# Altium PCB Controller.PcbDoc
Units mil, origin at the board's own origin, x right, y up, seen from the top; angles counter-clockwise.
Board outline 6010.03 x 4010.03 mil, 2 copper layers (Top Layer, Bottom Layer); 56 components, 119 nets, 386 pads, 30 vias.
Unrouted connection lines stored in the file: 6.
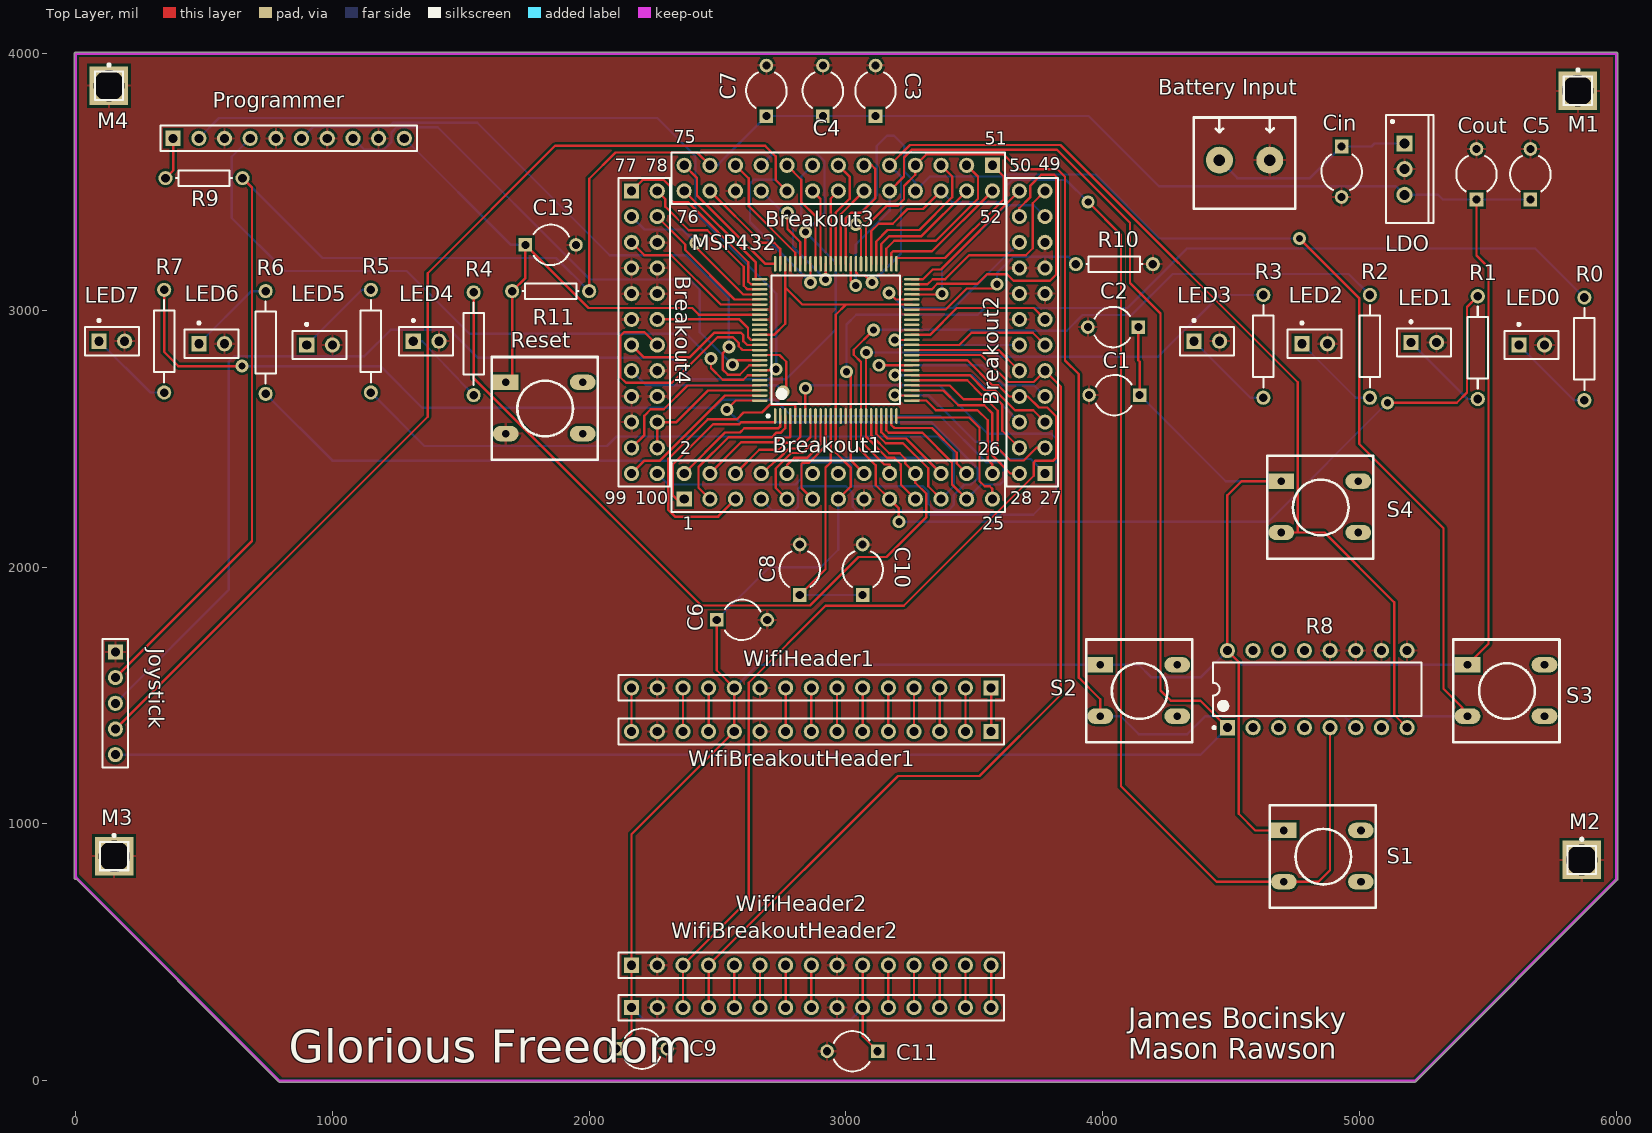
[diagram p0: Top Layer view]
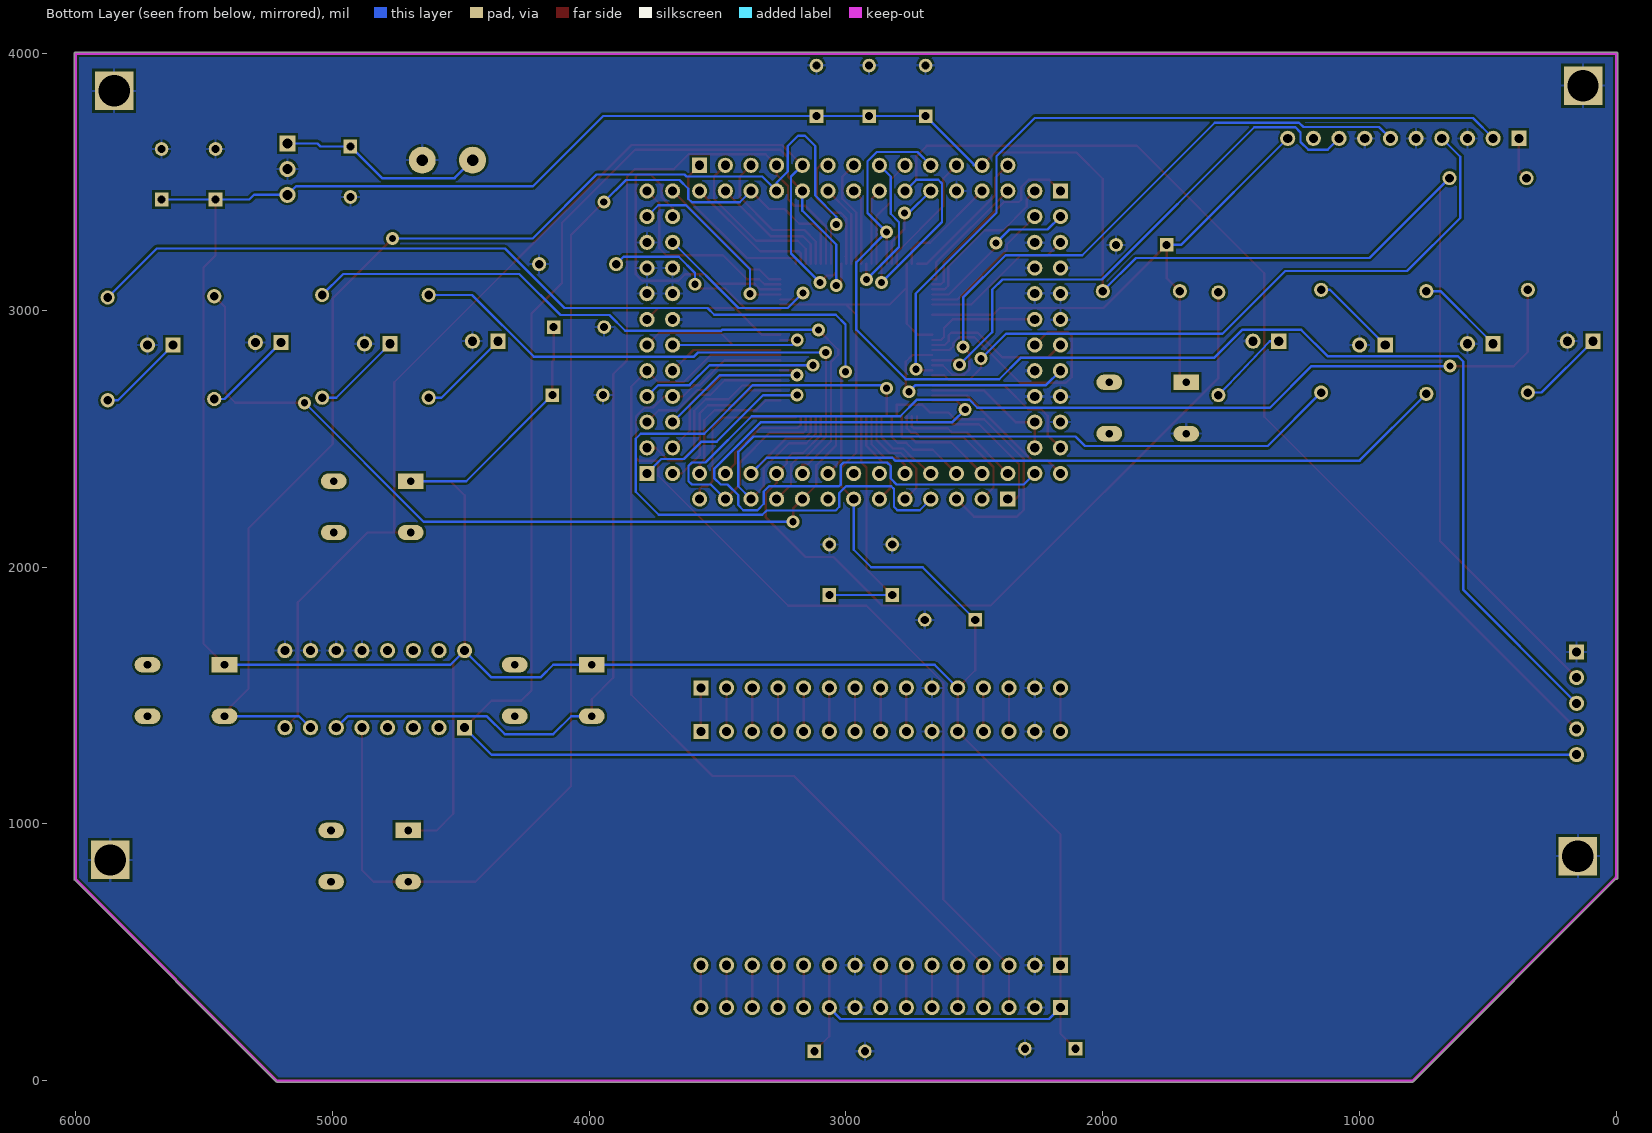
[diagram p1: Bottom Layer view, seen from below]

## Layer stack, top to bottom
Top Solder: solder mask 0.4, Solder Resist, Dk 3.5
Top Layer: signal copper 1.4
Dielectric 1: dielectric 12.6, FR-4, Dk 4.8
Bottom Layer: signal copper 1.4
Bottom Solder: solder mask 0.4, Solder Resist, Dk 3.5

## Board outline
2.34,785.57 cw(c0,790) -5.01,790 -5.01,4000 cw(c0,4000) 0,4005.02 6000,4005.02 cw(c6000,4000) 6005.02,4000 6005.02,785 cw(c6000,785) 6003.53,781.44 6003.55,781.45 5218.55,-3.55 5218.56,-3.53 cw(c5215,0) 5215,-5.01 795,-5.01 cw(c795,0) 791.44,-3.53 791.45,-3.55

## Design rules (kind name [scope] priority, off if disabled: settings)
Clearance [All] p1: gap=9
ComponentClearance [All] p1: gap=-1 collisioncheckmode=3 verticalgap=10 showdistances=FALSE
PolygonConnect [All] p1: connectstyle=Relief reliefconductorwidth=10 reliefentries=4 polygonreliefangle="90 Angle" airgapwidth=10
RoutingVias [All] p1: holewidth=28 width=50 viastyle="Through Hole" minholewidth=28 minwidth=50 maxholewidth=28 maxwidth=50
SolderMaskExpansion [All] p1: expansion=4
Width [All] p1: maxlimit=9 minlimit=9 preferedwidth=9
Width "Schematic Width Constraint" [InNet('3V3')] p2: maxlimit=30 minlimit=30 preferedwidth=30
Width MSP_Routing [WithinRoom('MSP_Room')] p3: maxlimit=9 minlimit=9 preferedwidth=9
29 further rules are at their usual default settings.

## Classes and differential pairs
component class msp432: C1 C2 C3 C4 C7 C8 C10 C13 MSP432 Programmer R9 R10 R11 Reset
component class Controller: "Battery Input" Breakout1 Breakout2 Breakout3 Breakout4 C5 C6 C9 C11 Cin Cout Joystick LDO LED0 LED1 LED2 LED3 LED4 LED5 LED6 LED7 M1 M2 M3 M4 R0 R1 R2 R3 R4 R5 R6 R7 R8 S1 S2 S3 S4 WifiBreakoutHeader1 WifiBreakoutHeader2 WifiHeader1 WifiHeader2

## Components (designator, comment, footprint, x,y, rotation, side; value= is the part's Value field where it differs from the comment)
"Battery Input" "Power Port" CON2screw 4650,3585 r180 top
Breakout1 "Header 13X2" HDR2X13 2370,2265 r0 top (schematic designator "Breakout1 13x2")
Breakout2 "Header 12X2" HDR2X12 3775,2365 r90 top (schematic designator "Breakout2 12x2")
Breakout3 "Header 13X2" HDR2X13 3570,3565 r180 top (schematic designator "Breakout3 13x2")
Breakout4 "Header 12X2" HDR2X12 2165,3465 r270 top (schematic designator "Breakout4 12x2")
C1 "Cap1" CAPR5-4X5 4045,2670 r180 top
C2 "Cap1" CAPR5-4X5 4040,2935 r180 top
C3 "Cap1" CAPR5-4X5 3115,3855 r90 top
C4 "Cap1" CAPR5-4X5 2910,3855 r90 top
C5 "Cap1" CAPR5-4X5 5665,3530 r90 top
C6 "Cap1" CAPR5-4X5 2595,1795 r0 top
C7 "Cap1" CAPR5-4X5 2690,3855 r90 top
C8 "Cap1" CAPR5-4X5 2820,1990 r90 top
C9 "Cap1" CAPR5-4X5 2205,125 r0 top
C10 "Cap1" CAPR5-4X5 3065,1990 r90 top
C11 "Cap1" CAPR5-4X5 3025,115 r180 top
C13 "Cap1" CAPR5-4X5 1850,3255 r0 top
Cin "Cap1" CAPR5-4X5 4930,3540 r270 top
Cout "Cap2" CAPR5-4X5 5455,3530 r90 top
Joystick "Header 5" HDR1X5 155,1670 r270 top (schematic designator "Joystick Breakout")
LDO "LM3940-3.3" T03B 5175,3550 r270 top
LED0 "LED0" PIN2 5620,2865 r0 top (schematic designator D0)
LED1 "LED1" PIN2 5200,2875 r0 top (schematic designator D1)
LED2 "LED2" PIN2 4775,2870 r0 top (schematic designator D2)
LED3 "LED3" PIN2 4355,2880 r0 top (schematic designator D3)
LED4 "LED4" PIN2 1315,2880 r0 top (schematic designator D4)
LED5 "LED5" PIN2 900,2865 r0 top (schematic designator D5)
LED6 "LED6" PIN2 480,2870 r0 top (schematic designator D6)
LED7 "LED7" PIN2 91.24,2880 r0 top (schematic designator D7)
M1 "Mount1" PIN1 5850,3855 r0 top
M2 "Mount2" PIN1 5865,860 r0 top
M3 "Mount3" PIN1 150,875 r0 top
M4 "Mount4" PIN1 130,3875 r0 top
MSP432 "MSP432" PZ100_L 2960,2885 r90 top (schematic designator MSP1)
Programmer "Header 10" HDR1X10 380,3670 r0 top (schematic designator "Programmer Breakout")
R0 "Res0" AXIAL-0.4 5875,2850 r90 top
R1 "Res1" AXIAL-0.4 5460,2855 r90 top
R2 "Res2" AXIAL-0.4 5040,2860 r90 top
R3 "Res3" AXIAL-0.4 4625,2860 r90 top
R4 "Res4" AXIAL-0.4 1550,2870 r90 top
R5 "Res5" AXIAL-0.4 1150,2880 r270 top
R6 "Res6" AXIAL-0.4 740,2875 r270 top
R7 "Res7" AXIAL-0.4 345,2880 r90 top
R8 "Res Pack3" DIP-16 4835,1525 r90 top
R9 "Res1" AXIAL-0.3 500,3515 r180 top
R10 "Res1" AXIAL-0.3 4045,3180 r0 top
R11 "Res1" AXIAL-0.3 1850,3075 r0 top
Reset "SW-PB" "SW PB" 1675,2720 r0 top (schematic designator S?)
S1 "SW-PB" "SW PB" 4705,975 r0 top
S2 "SW-PB" "SW PB" 3990,1620 r0 top
S3 "SW-PB" "SW PB" 5420,1620 r0 top
S4 "SW-PB" "SW PB" 4695,2335 r0 top
WifiBreakoutHeader1 "Header 15" HDR1X15 3565,1360 r180 top
WifiBreakoutHeader2 "Header 15" HDR1X15 2165,285 r0 top
WifiHeader1 "Header 15" HDR1X15 3565,1530 r180 top
WifiHeader2 "Header 15" HDR1X15 2165,450 r0 top

## Footprints (in the part's own frame and the unit in brackets; to place one, negate y for a bottom-side part, rotate by r counter-clockwise, add the part's x,y. Pads: shape width x height; smd on the part's side, far side on the other; paste and mask are expansions set on the pad)
AXIAL-0.3 [mm] "Axial Device, Thru-Hole; 2 Leads; 0.3 in Pin Spacing"
  round 1.4 hole 0.85: 1(-3.81,0) 2(3.81,0)
  silkscreen extent -2.77,-0.76 2.77,0.76
AXIAL-0.4 [mm] "Axial Device, Thru-Hole; 2 Leads; 0.4 in Pin Spacing"
  round 1.4 hole 0.85: 1(-5.08,0) 2(5.08,0)
  silkscreen extent -4.06,-1.02 4.06,1.02
CAPR5-4X5 [mm] "Capacitor; 2 Leads"
  rect 1.35x1.35 hole 0.8: 1(-2.5,0)
  round 1.35 hole 0.8: 2(2.5,0)
  silkscreen extent -1.69,-2 1.82,2
CON2screw [mil]
  round 105 hole 45: 1(0,0) 2(196,0)
  silkscreen extent -100,-166 296,189
DIP-16 [mm] "DIP; 16 Leads; Row Spacing 7.62 mm; Pitch 2.54 mm"
  rect 1.5x1.5 hole 0.9: 1(-3.81,8.89)
  round 1.5 hole 0.9: 2(-3.81,6.35) 3(-3.81,3.81) 4(-3.81,1.27) 5(-3.81,-1.27) 6(-3.81,-3.81) 7(-3.81,-6.35) 8(-3.81,-8.89) 9(3.81,-8.89) 10(3.81,-6.35) 11(3.81,-3.81) 12(3.81,-1.27) 13(3.81,1.27) 14(3.81,3.81) 15(3.81,6.35) 16(3.81,8.89)
  silkscreen extent -3.93,-10.3 2.65,10.31, body extent -3.6,-10.28 3.6,10.28, height 5.08
HDR1X5 [mm] "Connector; Header; 5 Position"
  rect 1.5x1.5 hole 0.9: 1(0,0)
  round 1.5 hole 0.9: 2(2.54,0) 3(5.08,0) 4(7.62,0) 5(10.16,0)
  silkscreen extent -1.27,-1.27 11.43,1.27
HDR1X10 [mm] "Connector; Header; 10 Position"
  rect 1.5x1.5 hole 0.9: 1(0,0)
  round 1.5 hole 0.9: 2(2.54,0) 3(5.08,0) 4(7.62,0) 5(10.16,0) 6(12.7,0) 7(15.24,0) 8(17.78,0) 9(20.32,0) 10(22.86,0)
  silkscreen extent -1.27,-1.27 24.13,1.27
HDR1X15 [mm] "Connector; Header; 15 Position"
  rect 1.5x1.5 hole 0.9: 1(0,0)
  round 1.5 hole 0.9: 2(2.54,0) 3(5.08,0) 4(7.62,0) 5(10.16,0) 6(12.7,0) 7(15.24,0) 8(17.78,0) 9(20.32,0) 10(22.86,0) 11(25.4,0) 12(27.94,0) 13(30.48,0) 14(33.02,0) 15(35.56,0)
  silkscreen extent -1.27,-1.27 36.83,1.27
HDR2X12 [mm] "Connector; Header; 12x2 Position"
  rect 1.5x1.5 hole 0.9: 1(0,0)
  round 1.5 hole 0.9: 2(0,2.54) 3(2.54,0) 4(2.54,2.54) 5(5.08,0) 6(5.08,2.54) 7(7.62,0) 8(7.62,2.54) 9(10.16,0) 10(10.16,2.54) 11(12.7,0) 12(12.7,2.54) 13(15.24,0) 14(15.24,2.54) 15(17.78,0) 16(17.78,2.54) 17(20.32,0) 18(20.32,2.54) 19(22.86,0) 20(22.86,2.54) 21(25.4,0) 22(25.4,2.54) 23(27.94,0) 24(27.94,2.54)
  silkscreen extent -1.27,-1.27 29.21,3.81
HDR2X13 [mm] "Connector; Header; 13x2 Position"
  rect 1.5x1.5 hole 0.9: 1(0,0)
  round 1.5 hole 0.9: 2(0,2.54) 3(2.54,0) 4(2.54,2.54) 5(5.08,0) 6(5.08,2.54) 7(7.62,0) 8(7.62,2.54) 9(10.16,0) 10(10.16,2.54) 11(12.7,0) 12(12.7,2.54) 13(15.24,0) 14(15.24,2.54) 15(17.78,0) 16(17.78,2.54) 17(20.32,0) 18(20.32,2.54) 19(22.86,0) 20(22.86,2.54) 21(25.4,0) 22(25.4,2.54) 23(27.94,0) 24(27.94,2.54) 25(30.48,0) 26(30.48,2.54)
  silkscreen extent -1.27,-1.27 31.75,3.81
PIN1 [mm] "Generic Antenna; 1 Lead"
  rect 3.81x3.81 hole 3.1: 1(0,0)
  silkscreen extent -1.4,-1.4 1.4,2.17
PIN2 [mm] "Photosensitive Diode; 2 Leads"
  rect 1.5x1.5 hole 0.9: 1(0,0)
  round 1.5 hole 0.9: 2(2.54,0)
  silkscreen extent -1.4,-1.4 3.94,2.17
PZ100_L [mm] "100-Pin Thin Quad Flat Pack 0.5 mm Pitch, IPC High Density"
  oval 1.55x0.25 smd: 1(-7.525,6) 2(-7.525,5.5) 3(-7.525,5) 4(-7.525,4.5) 5(-7.525,4) 6(-7.525,3.5) 7(-7.525,3) 8(-7.525,2.5) 9(-7.525,2) 10(-7.525,1.5) 11(-7.525,1) 12(-7.525,0.5) 13(-7.525,0) 14(-7.525,-0.5) 15(-7.525,-1) 16(-7.525,-1.5) 17(-7.525,-2) 18(-7.525,-2.5) 19(-7.525,-3) 20(-7.525,-3.5) 21(-7.525,-4) 22(-7.525,-4.5) 23(-7.525,-5) 24(-7.525,-5.5) 25(-7.525,-6) 51(7.525,-6) 52(7.525,-5.5) 53(7.525,-5) 54(7.525,-4.5) 55(7.525,-4) 56(7.525,-3.5) 57(7.525,-3) 58(7.525,-2.5) 59(7.525,-2) 60(7.525,-1.5) 61(7.525,-1) 62(7.525,-0.5) 63(7.525,0) 64(7.525,0.5) 65(7.525,1) 66(7.525,1.5) 67(7.525,2) 68(7.525,2.5) 69(7.525,3) 70(7.525,3.5) 71(7.525,4) 72(7.525,4.5) 73(7.525,5) 74(7.525,5.5) 75(7.525,6)
  oval 0.25x1.55 smd: 26(-6,-7.525) 27(-5.5,-7.525) 28(-5,-7.525) 29(-4.5,-7.525) 30(-4,-7.525) 31(-3.5,-7.525) 32(-3,-7.525) 33(-2.5,-7.525) 34(-2,-7.525) 35(-1.5,-7.525) 36(-1,-7.525) 37(-0.5,-7.525) 38(0,-7.525) 39(0.5,-7.525) 40(1,-7.525) 41(1.5,-7.525) 42(2,-7.525) 43(2.5,-7.525) 44(3,-7.525) 45(3.5,-7.525) 46(4,-7.525) 47(4.5,-7.525) 48(5,-7.525) 49(5.5,-7.525) 50(6,-7.525) 76(6,7.525) 77(5.5,7.525) 78(5,7.525) 79(4.5,7.525) 80(4,7.525) 81(3.5,7.525) 82(3,7.525) 83(2.5,7.525) 84(2,7.525) 85(1.5,7.525) 86(1,7.525) 87(0.5,7.525) 88(0,7.525) 89(-0.5,7.525) 90(-1,7.525) 91(-1.5,7.525) 92(-2,7.525) 93(-2.5,7.525) 94(-3,7.525) 95(-3.5,7.525) 96(-4,7.525) 97(-4.5,7.525) 98(-5,7.525) 99(-5.5,7.525) 100(-6,7.525)
  silkscreen extent -7.65,-6.35 6.35,6.8, body extent -7,-7 7,7, height 1.6
"SW PB" [mil]
  rect 100x60 hole 30: 1(0,0)
  oval 100x60 hole 30: 2(0,-200) 3(300,-200) 4(300,0)
  silkscreen extent -55,-302 358,98
T03B [mm]
  rect 1.6x1.6 hole 1: 1(-2.54,0)
  round 1.6 hole 1: 2(0,0) 3(2.54,0)
  silkscreen extent -5.35,-1.85 5.35,2.85, body extent -5.4,-1.9 5.4,2.9, height 19.4

## Part data
"Battery Input": library part Power
Breakout1 Breakout3: "Header, 13-Pin, Dual row"
Breakout2 Breakout4: "Header, 12-Pin, Dual row"
C1 C2 C3 C4 C5 C6 C7 C8 C9 C10 C11 C13 Cin: library part Cap2, "Capacitor"
Cout: "Capacitor"
Joystick: "Header, 5-Pin"
LDO: library part LM2940CT-5.0, "1A Low Dropout Regulator, 3-pin TO-220"
LED0: "Typical INFRARED GaAs LED"
LED1 LED2 LED3 LED4 LED5 LED6 LED7: library part LED0, "Typical INFRARED GaAs LED"
M1 M2 M3 M4: library part Antenna, "Generic Antenna"
Programmer: "Header, 10-Pin"
R0 R1 R3 R4 R5 R6 R7: library part Res2, "Resistor"
R2 R9 R10 R11: "Resistor"
R8: "Isolated Resistor Network"
Reset S1 S2 S3 S4: library part SW-PB_2, "DIGIKEY SW400-ND"
WifiBreakoutHeader1 WifiBreakoutHeader2 WifiHeader1 WifiHeader2: "Header, 15-Pin"

## Via types
v1: diameter 50, hole 28, Top Layer to Bottom Layer, 30 vias

## Nets (pads, with @x,y where several pads share a name; then routed paths per layer and width w, separated by ;. In a path a pad name is that pad's centre, name@x,y a point inside that pad or via, vN(x,y) a via of type N, cw(c..) or ccw(c..) an arc to the next point about the centre after c; other vN are vias at no path point)
3V3: Breakout1.13 Breakout3.23 C1.1 C2.1 C3.1 C4.1 C5.1 C6.1 C7.1 C9.1 C11.1 Cout.1 Joystick.2 LDO.3 MSP432.13 MSP432.45 MSP432.73 MSP432.87 R8.16 R9.1 R11.2 S1.1 S2.1 S3.1 S4.1 WifiBreakoutHeader1.11 WifiBreakoutHeader2.1 WifiBreakoutHeader2.10 WifiHeader1.11 WifiHeader2.1 WifiHeader2.10 | length 21246.4
  Top Layer w9: Joystick.2 686.97,2101.97 686.97,3478.03 R9.1 ; R11.2 2000,3513 2102,3615 2420,3615 Breakout3.23 ; C9.1 2165,183.43 WifiBreakoutHeader2.1 WifiHeader2.1 2165,960 WifiBreakoutHeader1.11 WifiHeader1.11 2496.57,1598.43 C6.1 ; MSP432.87 2720,2904.69 2763.15,2947.84 2763.15,3089 ; MSP432.73 2763.15,3089 ; Breakout1.13 3018,2313 3018,2387.72 2960,2445.72 MSP432.13 2960,2982.8 3000,3022.8 ; WifiHeader2.10 WifiBreakoutHeader2.10 3065,173.43 C11.1 ; MSP432.45 3000,3022.8 ; C2.1 4138.43,2805 4143.43,2800 C1.1 ; S4.1 4540,2335 4485,2280 R8.16 4529,1631 4529,1040 4594,975 S1.1 ; S3.1 5502,1702 5502,3167 5455,3214 Cout.1 ; 2763.15,3089 2829.35,3022.8 3000,3022.8
  Bottom Layer w9: R9.1 961,3204 1871,3204 R11.2 ; WifiBreakoutHeader2.1 2209,241 3021,241 WifiBreakoutHeader2.10 ; Breakout3.23 2503,3565 2503,3569.57 C7.1 C4.1 C3.1 3945.43,3756.57 4219,3483 5142,3483 LDO.3 5305,3450 5323.43,3431.57 Cout.1 C5.1 ; C6.1 2701.57,2000 2902,2000 2970,2068 Breakout1.13 ; WifiHeader1.11 2655,1620 S2.1 4140,1620 4188,1572 4382,1572 R8.16 4540,1620 S3.1 ; C1.1 4478.43,2335 S4.1
BATTERY+: "Battery Input.2" Cin.1 LDO.1 | length 805.9
  Bottom Layer w9: 4454,3585 4524,3515 4806.57,3515 Cin.1 5046,3638.43 5057.57,3650 LDO.1
BUTTON1: Breakout3.6 MSP432.56 R8.5 S1.2 | length 5019.3
  Top Layer w9: MSP432.56 3097.8,3307.8 3127.45,3337.45 3181.9,3337.45 3239.46,3395 3300,3395 Breakout3.6 ; v1(3943,3421.97) 4071,3293.97 4071,1147 4443,775 S1.2 4840,775 4885,820 R8.5
  Bottom Layer w9: Breakout3.6 3414,3421 3600,3421 3614,3435 3614,3474 3648.03,3508.03 3856.94,3508.03 v1(3943,3421.97)
BUTTON2: Breakout3.7 MSP432.57 R8.6 S2.2 | length 4352.6
  Top Layer w9: MSP432.57 3078.11,3327.06 3158.05,3407 3200,3407 3226,3433 3226,3484.03 3270,3528.03 Breakout3.7 3313.03,3608.03 3613.03,3608.03 3671.06,3550 3823,3550 3853,3520 3853,2805 3906,2752 3906,1570 3990,1486 S2.2
  Bottom Layer w9: S2.2 4070,1420 4140,1350 4329,1350 4398,1419 4941,1419 R8.6
BUTTON3: Breakout3.8 MSP432.58 R8.7 S3.2 | length 4956
  Top Layer w9: v1(3038,3334) 3058.43,3313.57 MSP432.58 ; v1(4766,3280) 4998,3048 4998,2481 5327,2152 5327,1527 5400,1454 5400,1420 S3.2
  Bottom Layer w9: v1(3038,3334) 3038,3365 3120,3447 3120,3640 3160,3680 3186.97,3680 3226.97,3640 3226.97,3541.03 3270,3498 Breakout3.8 3326,3521 3621,3521 3629,3529 3971,3529 4220,3280 v1(4766,3280) ; R8.7 5130,1420 S3.2
BUTTON4: Breakout3.9 MSP432.59 R8.8 S4.2 | length 4284
  Top Layer w9: MSP432.59 3038.74,3147.23 3050,3135.97 3074.03,3135.97 v1(3101,3109) ; Breakout3.9 3249.03,3644.03 3834.97,3644.03 4759,2720 4759,2135 ; S4.2 4759,2135 ; R8.8 5135,1425 5135,1863 4863,2135 4759,2135
  Bottom Layer w9: v1(3101,3109) 3214,3222 3214,3521 Breakout3.9
DCOR: MSP432.44 R10.1 | length 761.8
  Top Layer w9: MSP432.44 3388.61,3003.11 3470.5,3085 3571,3085 v1(3588,3102)
  Bottom Layer w9: v1(3588,3102) 3588,3146 3651,3209 3866,3209 R10.1
GND: "Battery Input.1" Breakout1.12 Breakout1.14 Breakout1.15 Breakout2.14 Breakout2.15 Breakout2.16 Breakout2.17 Breakout2.18 Breakout2.19 Breakout3.22 Breakout4.6 Breakout4.7 Breakout4.8 Breakout4.9 Breakout4.10 Breakout4.11 Breakout4.16 Breakout4.17 Breakout4.18 Breakout4.19 C1.2 C2.2 C3.2 C4.2 C5.2 C6.2 C7.2 C8.2 C9.2 C10.2 C11.2 C13.2 Cin.2 Cout.2 Joystick.1 LDO.2 LED0.2 LED1.2 LED2.2 LED3.2 LED4.2 LED5.2 LED6.2 LED7.2 M1.1 M2.1 M3.1 M4.1 MSP432.15 MSP432.40 MSP432.43 MSP432.72 MSP432.82 MSP432.84 Programmer.3 Programmer.5 Programmer.7 Programmer.9 R8.9 R8.10 R8.11 R8.12 R10.2 Reset.2 WifiBreakoutHeader1.10 WifiBreakoutHeader1.14 WifiBreakoutHeader2.2 WifiBreakoutHeader2.9 WifiHeader1.10 WifiHeader1.14 WifiHeader2.2 WifiHeader2.9
NetLED0_1: LED0.1 R0.1 | length 344.1
  Bottom Layer w9: LED0.1 5835,2650 R0.1
NetLED1_1: LED1.1 R1.1 | length 351.1
  Bottom Layer w9: LED1.1 5420,2655 R1.1
NetLED2_1: LED2.1 R2.1 | length 352
  Bottom Layer w9: LED2.1 4985,2660 R2.1
NetLED3_1: LED3.1 R3.1 | length 361.1
  Bottom Layer w9: LED3.1 4575,2660 R3.1
NetLED4_1: LED4.1 R4.1 | length 325
  Bottom Layer w9: LED4.1 1350,2880 R4.1
NetLED5_1: LED5.1 R5.1 | length 339.1
  Bottom Layer w9: LED5.1 1115,3080 R5.1
NetLED6_1: LED6.1 R6.1 | length 344.9
  Bottom Layer w9: LED6.1 685,3075 R6.1
NetLED7_1: LED7.1 R7.1 | length 336.6
  Bottom Layer w9: LED7.1 291.24,2680 R7.1
NetProgrammer_1: Programmer.1 R9.2 | length 167.4
  Top Layer w9: R9.2 380,3545 Programmer.1
P1.0: Breakout1.4 MSP432.4 | length 453.6
  Top Layer w9: Breakout1.4 2592,2487 2729,2487 2747,2505 2781.15,2505 2782.83,2506.68 MSP432.4
P1.1: Breakout1.5 MSP432.5 | length 1125.9
  Top Layer w9: Breakout1.5 2502,2197 2334,2197 2308.03,2222.97 2308.03,2421.72 2461.8,2575.49 2574.8,2575.49 2601.31,2602 2673,2602 2704,2633 2802.52,2633 MSP432.5
P1.2: Breakout1.6 MSP432.6 | length 392.5
  Top Layer w9: Breakout1.6 2662,2457 2738.48,2457 2765.88,2484.4 2799.15,2484.4 2822.2,2507.45 MSP432.6
P1.3: Breakout1.7 MSP432.7 | length 2743.6
  Top Layer w9: MSP432.7 v1(2841.89,2697)
  Bottom Layer w9: Breakout1.7 2713.03,2221.97 2800,2221.97 2813.03,2235 2813.03,2303.97 2824.06,2315 3000,2315 3026,2289 3026,2235 3040,2221 3308.97,2221 3326,2203.97 3728.97,2203.97 3819,2294 3819,2500 3799,2520 3552,2520 3363,2709 2853.89,2709 v1(2841.89,2697)
P1.4: Breakout1.8 MSP432.8 | length 329.6
  Top Layer w9: Breakout1.8 2742.5,2427.5 2777.4,2462.4 2817.15,2462.4 2861.57,2506.83 MSP432.8
P1.5: Breakout1.9 MSP432.9 | length 432.1
  Top Layer w9: Breakout1.9 2726,2309 2726,2383.54 2786.86,2444.4 2830.87,2444.4 2881.26,2494.79 MSP432.9
P1.6: Breakout1.10 MSP432.10 | length 307.2
  Top Layer w9: Breakout1.10 2770,2397.47 2798.25,2425.71 2848.18,2425.71 2900.94,2478.47 MSP432.10
P1.7: Breakout1.11 MSP432.11 | length 394.5
  Top Layer w9: Breakout1.11 2826.97,2308.03 2826.97,2402.49 2831.41,2406.92 2855.61,2406.92 2920.63,2471.94 MSP432.11
P2.0: Breakout1.16 MSP432.16 R0.2 | length 3683.1
  Top Layer w9: v1(3002,2761) 3019.06,2743.94 MSP432.16 3019.06,2415.94 Breakout1.16
  Bottom Layer w9: v1(3002,2761) 3002,2945 3040,2983 3513,2983 3539,3009 4096,3009 4328.31,3241.31 5683.69,3241.31 R0.2
P2.1: Breakout1.17 MSP432.17 R1.2 | length 3293.8
  Top Layer w9: MSP432.17 3038.74,2473.97 3116.24,2396.47 3116.24,2318.76 Breakout1.17 3206,2229 v1(3206,2177) ; v1(5108,2640) 5378,2640 5418,2680 5418,3013 R1.2
  Bottom Layer w9: v1(3206,2177) 4645,2177 v1(5108,2640)
P2.2: Breakout1.18 MSP432.18 R2.2 | length 2720.9
  Top Layer w9: v1(3107,2924) 3030,2847 3030,2827 3058.43,2798.57 MSP432.18 3058.43,2490.28 3149.02,2399.69 3170,2399.69 Breakout1.18
  Bottom Layer w9: v1(3107,2924) 3482,2924 3485,2921 3860,2921 3921,2982 4112,2982 4272,3142 4958,3142 R2.2
P2.3: Breakout1.19 MSP432.19 R3.2 | length 2318.6
  Top Layer w9: v1(3079.22,2836) 3078.11,2834.89 MSP432.19 3078.11,2508.46 3160.88,2425.69 3188,2425.69 3213,2400.69 3213,2377 3214,2376 3214,2321 Breakout1.19
  Bottom Layer w9: v1(3079.22,2836) 3576,2836 3592,2820 4216,2820 4456,3060 R3.2
P2.4: Breakout1.20 MSP432.20 R4.2 | length 3112.6
  Top Layer w9: R4.2 1550,2737 2436,1851 2860.08,1851 3049.08,2040 3158,2040 3313.03,2195.03 3313.03,2285.97 3270,2329 Breakout1.20 3231.03,2403.97 3231.03,2422.28 3209.61,2443.69 3168.33,2443.69 3097.8,2514.23 MSP432.20
P2.5: Breakout1.21 MSP432.21 R5.2 | length 3068.9
  Top Layer w9: MSP432.21 3117.48,2520 3154.48,2483 3222,2483 3320,2385 3320,2315 Breakout1.21
  Bottom Layer w9: R5.2 1358,2472 2069,2472 2106,2509 3360,2509 3420,2449 3420,2315 Breakout1.21
P2.6: Breakout1.22 MSP432.22 R6.2 | length 3129.8
  Top Layer w9: MSP432.22 3137.17,2526 3162,2501.17 3233.83,2501.17 Breakout1.22
  Bottom Layer w9: R6.2 1000,2415 2808.97,2415 2820,2426.03 3308.97,2426.03 Breakout1.22
P2.7: Breakout1.23 MSP432.23 R7.2 | length 4481.9
  Top Layer w9: R7.2 345,2838 400,2783 v1(648,2783) ; MSP432.23 3156.85,2533.1 3166.3,2523.65 3297.38,2523.65 3413.03,2408 3413.03,2321.97 Breakout1.23
  Bottom Layer w9: v1(648,2783) 1187,2783 1349,2621 2488.5,2621 2520,2652.5 2723.96,2652.5 2788.46,2588 3367,2588 3546.97,2408.03 3600,2408.03 3613.03,2395 3613.03,2335 3600,2321.97 3526.97,2321.97 Breakout1.23
P3.0: Breakout2.6 MSP432.32 | length 632.9
  Top Layer w9: v1(3191,2748) 3209.89,2766.89 MSP432.32
  Bottom Layer w9: v1(3191,2748) 3492,2748 Breakout2.6
P3.1: Breakout2.7 MSP432.33 | length 823.6
  Top Layer w9: v1(3129,2786.57) MSP432.33
  Bottom Layer w9: v1(3129,2786.57) 3531.43,2786.57 3609,2709 3731,2709 Breakout2.7
P3.2: Breakout2.8 MSP432.34 WifiBreakoutHeader2.3 WifiHeader2.3 | length 3776.3
  Top Layer w9: WifiBreakoutHeader2.3 WifiHeader2.3 2621,706 2621,1550.3 2920.7,1850 3225,1850 3731,2356 3731,2408 3738,2415 3808,2415 3818.03,2425.03 3818.03,2587.97 3784.03,2621.97 3751.03,2621.97 3708,2665 Breakout2.8 3636,2665 3593,2708 3570,2708 3471.74,2806.26 MSP432.34
P3.3: Breakout2.9 MSP432.35 WifiBreakoutHeader2.4 WifiHeader2.4 | length 3839.9
  Top Layer w9: WifiBreakoutHeader2.4 WifiHeader2.4 3202,1187 3520,1187 3836.03,1503.03 3836.03,2703.97 Breakout2.9 3731,2721 3631.46,2721 3526.52,2825.94 MSP432.35
P3.4: Breakout2.10 MSP432.36 | length 452.1
  Top Layer w9: MSP432.36 3594.37,2845.63 Breakout2.10
P3.5: Breakout2.11 MSP432.37 | length 558.4
  Top Layer w9: MSP432.37 3441,2865.32 3488.68,2913 3727,2913 Breakout2.11
P3.6: Breakout2.12 MSP432.38 | length 559.5
  Top Layer w9: v1(3190,2885) MSP432.38
  Bottom Layer w9: v1(3190,2885) 3210,2865 Breakout2.12
P3.7: Breakout2.13 MSP432.39 | length 580.2
  Top Layer w9: MSP432.39 3326.69,2904.69 3431,3009 3731,3009 Breakout2.13
P4.4: Breakout3.10 Joystick.5 MSP432.60 R8.1 | length 8242.7
  Top Layer w9: MSP432.60 3019.06,3115.94 v1(3038,3097) ; Breakout3.10 3226,3521 3226,3595 3257.03,3626.03 3820.97,3626.03 4106,3341 4106,3107 4225,2988 4225,1520 4265,1480 4380,1480 R8.1
  Bottom Layer w9: Joystick.5 4380,1270 R8.1 ; v1(3038,3097) 3038,3256.55 3170,3388.55 Breakout3.10
P4.5: Breakout3.11 MSP432.61 | length 490.6
  Top Layer w9: MSP432.61 2999.37,3207 3000.63,3208.26 2999.5,3209.4 2999.5,3360.1 3020,3380.6 3058.6,3380.6 3114,3436 3114,3551 3100,3565 Breakout3.11
P4.6: Breakout3.12 MSP432.62 | length 321.1
  Top Layer w9: MSP432.62 2979.69,3374.69 Breakout3.12
P4.7: Breakout3.13 MSP432.63 | length 424.3
  Top Layer w9: MSP432.63 2960,3380.85 3014,3434.85 3014,3521 Breakout3.13
P5.0: Breakout3.14 MSP432.64 | length 296
  Top Layer w9: MSP432.64 2940.31,3435.31 Breakout3.14
P5.1: Breakout3.15 MSP432.65 | length 590.6
  Top Layer w9: v1(2920.63,3120) MSP432.65
  Bottom Layer w9: Breakout3.15 2826,3521 2826,3376 2793.5,3343.5 2793.5,3247.13 v1(2920.63,3120)
P5.2: Breakout3.16 MSP432.66 | length 296.6
  Top Layer w9: Breakout3.16 2900.94,3434.06 MSP432.66
P5.3: Breakout3.17 MSP432.67 | length 429.8
  Top Layer w9: Breakout3.17 2826,3509 2826,3422.26 2881.26,3367 MSP432.67
P5.4: Breakout3.18 Joystick.4 MSP432.68 | length 4732.6
  Top Layer w9: Joystick.4 1371,2586 1371,3145 1867,3641 2685,3641 2726,3600 2726,3509 Breakout3.18 ; v1(2861.57,3109) MSP432.68
  Bottom Layer w9: Breakout3.18 2726,3509 2641,3509 2626,3494 2626,3344.57 v1(2861.57,3109)
P5.5: Breakout3.19 Joystick.3 MSP432.69 | length 5229.4
  Top Layer w9: MSP432.69 v1(2841.89,3305)
  Bottom Layer w9: Joystick.3 596,1911 596,2800 617.97,2821.97 1125,2821.97 1227.03,2924 1458,2924 1567,2815 2320,2815 2403.14,2731.86 2766.75,2731.86 2960,2925.1 2960,3186.89 v1(2841.89,3305) 2916,3379.11 2916,3581 2880,3617 2722,3617 Breakout3.19
P5.6: Breakout3.20 MSP432.70 | length 356.2
  Top Layer w9: v1(2772.2,3378.8) 2772.2,3316.5 2822.2,3266.5 MSP432.70
  Bottom Layer w9: Breakout3.20 2756.2,3378.8 v1(2772.2,3378.8)
P5.7: Breakout3.21 MSP432.71 | length 480.1
  Top Layer w9: Breakout3.21 2621,3514 2621,3406 2802.52,3224.48 MSP432.71
P6.0: Breakout3.4 MSP432.54 | length 495.3
  Top Layer w9: MSP432.54 3137.17,3258 3168.42,3289.25 3294.25,3289.25 Breakout3.4
P6.1: Breakout3.5 MSP432.55 | length 597.4
  Top Layer w9: MSP432.55 3117.48,3268.48 3162,3313 3286,3313 3414,3441 3414,3521 Breakout3.5
P6.2: Breakout3.26 MSP432.76 | length 474.1
  Top Layer w9: Breakout3.26 2649,3186 2649,3121.22 MSP432.76
P6.3: Breakout4.1 MSP432.77 | length 758.7
  Top Layer w9: Breakout4.1 2209,3509 2289,3509 2318,3480 2318,3430.97 2327,3421.97 2385.03,3421.97 2619.73,3187.27 2619.73,3111.81 2630,3101.54 MSP432.77
P6.4: Breakout4.2 MSP432.78 | length 618.5
  Top Layer w9: Breakout4.2 2296.04,3433.96 2296.04,3403.97 2388.01,3312 2460,3312 2601.73,3170.27 2601.73,3096.07 2615.95,3081.85 MSP432.78
P6.5: Breakout4.3 MSP432.79 | length 633.5
  Top Layer w9: v1(2416,3262) 2416,3246.17 2600,3062.17 MSP432.79
  Bottom Layer w9: Breakout4.3 2215,3315 2363,3315 v1(2416,3262)
P6.6: Breakout4.4 MSP432.80 | length 544.8
  Top Layer w9: Breakout4.4 2373.83,3256.17 2373.83,3234.88 2566.22,3042.48 MSP432.80
P6.7: Breakout4.5 MSP432.81 | length 599.1
  Top Layer w9: Breakout4.5 2215,3215 2319.8,3215 2512,3022.8 MSP432.81
P7.0: Breakout4.12 MSP432.88 | length 452.4
  Top Layer w9: Breakout4.12 2585,2965 2618.5,2931.5 2618.5,2896.5 2630,2885 MSP432.88
P7.1: Breakout4.13 MSP432.89 | length 592
  Top Layer w9: Breakout4.13 2213,2817 2391,2817 2487.5,2913.5 2590,2913.5 2600.5,2903 2600.5,2880 2615.18,2865.32 MSP432.89
P7.2: Breakout4.14 MSP432.90 | length 984.6
  Top Layer w9: Breakout4.14 2215,2915 2136,2915 2121,2900 2121,2740 2143,2718 2322,2718 2499.5,2895.5 2560,2895.5 2582.5,2873 2582.5,2860 2596.87,2845.63 MSP432.90
P7.3: Breakout4.15 MSP432.91 | length 859.9
  Top Layer w9: MSP432.91 2741.06,2825.94 2767,2800 2767,2695 v1(2755,2683)
  Bottom Layer w9: Breakout4.15 2221,2709 2729,2709 v1(2755,2683)
P7.4: Breakout1.26 MSP432.26 | length 541.9
  Top Layer w9: MSP432.26 3312.73,2648.78 3349.98,2611.53 3512.38,2611.53 3552,2571.91 3552,2418.09 3570,2400.09 Breakout1.26
P7.5: Breakout2.1 MSP432.27 | length 777.9
  Top Layer w9: v1(3190.14,2670) 3191.68,2668.46 MSP432.27
  Bottom Layer w9: v1(3190.14,2670) 3322,2670 3503.07,2488.93 3563.1,2488.93 3631.03,2421 3719,2421 Breakout2.1
P7.6: Breakout2.2 MSP432.28 | length 648.6
  Top Layer w9: MSP432.28 3379.85,2688.15 3437,2631 3537.93,2631 3570,2598.93 3570,2435 3640,2365 Breakout2.2
P7.7: Breakout2.3 MSP432.29 | length 745.4
  Top Layer w9: MSP432.29 3404.06,2707.83 3458.02,2653.87 3545.98,2653.87 3590.6,2609.25 3590.6,2464.4 3639.76,2415.24 3692.23,2415.24 3742,2465 Breakout2.3
P8.0: Breakout2.4 MSP432.30 | length 587.2
  Top Layer w9: MSP432.30 3472.48,2727.52 3528.13,2671.87 3570.13,2671.87 3608.6,2633.4 3608.6,2531.4 Breakout2.4
P8.1: Breakout2.5 MSP432.31 | length 594.2
  Top Layer w9: MSP432.31 3482.39,2747.2 3539.72,2689.87 3579.05,2689.87 3657.79,2611.14 3728.86,2611.14 Breakout2.5
P8.2: Breakout2.20 MSP432.46 | length 736.3
  Top Layer w9: v1(3168,3068) 3193.52,3042.48 MSP432.46
  Bottom Layer w9: v1(3168,3068) 3227,3009 3419,3009 Breakout2.20
P8.3: Breakout2.21 MSP432.47 | length 736.3
  Top Layer w9: MSP432.47 3371.17,3062.17 v1(3374,3065)
  Bottom Layer w9: v1(3374,3065) 3374,3160 3623,3409 3731,3409 Breakout2.21
P8.4: Breakout2.22 MSP432.48 | length 1248.7
  Top Layer w9: MSP432.48 3333.85,3081.85 3355.5,3103.5 3512.3,3103.5 3549.5,3140.7 3626.7,3140.7 3652.4,3115 3794,3115 3819,3140 3819,3520 3810.97,3528.03 3760,3528.03 3718.03,3486.06 3718.03,3441.03 3675,3398 Breakout2.22
P8.5: Breakout2.23 MSP432.49 | length 771.8
  Top Layer w9: MSP432.49 3317.54,3101.54 3337.5,3121.5 3385.96,3121.5 3479.46,3215 3700,3215 3726.85,3241.85 3726.85,3416.85 Breakout2.23
P8.6: Breakout2.24 MSP432.50 | length 561.1
  Top Layer w9: MSP432.50 3299.54,3121.22 3337.82,3159.5 3369.5,3159.5 Breakout2.24
P8.7: Breakout3.1 MSP432.51 | length 686.2
  Top Layer w9: MSP432.51 3196.22,3204 3386,3204 3614,3432 3614,3521 Breakout3.1
P9.0: Breakout3.2 MSP432.52 | length 535.8
  Top Layer w9: MSP432.52 3176.54,3223.66 3182.87,3230 3335,3230 Breakout3.2
P9.1: Breakout3.3 MSP432.53 | length 644.9
  Top Layer w9: MSP432.53 3156.85,3240 3188.1,3271.25 3350.25,3271.25 3514,3435 3514,3521 Breakout3.3
P9.2: Breakout3.24 MSP432.74 | length 425.4
  Top Layer w9: Breakout3.24 2672,3263 2720.46,3263 2743.46,3240 MSP432.74
P9.3: Breakout3.25 MSP432.75 | length 552.9
  Top Layer w9: Breakout3.25 2420,3515 2420,3447 2686,3181 2723.78,3181 MSP432.75
P9.4: MSP432.96
P9.5: Breakout4.21 MSP432.97 | length 643.3
  Top Layer w9: Breakout4.21 2215,2515 2215,2590 2240,2615 2290,2615 2382.83,2707.83 MSP432.97
P9.6: Breakout4.20 Breakout4.22 MSP432.98 | length 549.8
  Top Layer w9: Breakout4.22 Breakout4.20 2339.58,2565 2462.73,2688.15 MSP432.98
P9.7: Breakout4.23 MSP432.99 | length 624.4
  Top Layer w9: Breakout4.23 2215,2415 2275.85,2415 2529.32,2668.46 MSP432.99
P10.0: Breakout4.24 MSP432.100 | length 2805.7
  Top Layer w9: v1(2536,2614) 2570.78,2648.78 MSP432.100
  Bottom Layer w9: Breakout4.24 2308.03,2321.97 2802.97,2321.97 2826,2345 2826,2394.03 2840,2408.03 3009.97,2408.03 3020,2398 3020,2322 3027,2315 3300,2315 3320,2295 3320,2247 3345.03,2221.97 3400,2221.97 3420,2241.97 3420,2281 3460.97,2321.97 3487.82,2321.97 3513.61,2347.75 3513.61,2382.25 3330.85,2565 2585,2565 v1(2536,2614)
P10.1: Breakout1.1 MSP432.1 | length 661
  Top Layer w9: Breakout1.1 2340,2265 2326.03,2278.97 2326.03,2400.57 2481.74,2556.29 2584.09,2556.29 2592.8,2565 2723.78,2565 MSP432.1
P10.2: Breakout1.2 MSP432.2 | length 490.4
  Top Layer w9: Breakout1.2 2529.35,2524.35 2587.03,2524.35 2603.74,2541.06 2737.21,2541.06 2743.46,2547.31 MSP432.2
P10.3: Breakout1.3 MSP432.3 | length 590.3
  Top Layer w9: Breakout1.3 2426,2309 2426,2390 2542.35,2506.35 2710.52,2506.35 2727.23,2523.06 2744.67,2523.06 2763.15,2541.54 MSP432.3
P10.4: Breakout1.24 MSP432.24 | length 430.7
  Top Layer w9: MSP432.24 3176.54,2554 3188.89,2541.65 3334.74,2541.65 3431.03,2445.36 3431.03,2403.97 Breakout1.24
P10.5: Breakout1.25 MSP432.25 | length 656.5
  Top Layer w9: MSP432.25 3196.22,2583 3480,2583 3520,2543 3520,2335 3540,2315 3560,2315 3570,2305 Breakout1.25
R\S\T\: C13.1 MSP432.83 Programmer.10 R11.1 Reset.1 | length 2249.5
  Top Layer w9: Reset.1 1700,2720 R11.1 1751.57,3126.57 C13.1 1997.57,3009 2401,3009 2426.57,2983.43 MSP432.83
  Bottom Layer w9: Programmer.10 1695,3255 C13.1
TCK_SWCLK: MSP432.95 Programmer.4 | length 2684.7
  Top Layer w9: v1(2474,2812) 2474,2776 2520,2730 2599.8,2730 2617,2747.2 MSP432.95
  Bottom Layer w9: Programmer.4 608,3598 608,3360 815,3153 1290,3153 1534,2909 2377,2909 v1(2474,2812)
TDI: MSP432.92 Programmer.8 | length 2147.1
  Top Layer w9: v1(2558,2788) 2576.26,2806.26 MSP432.92
  Bottom Layer w9: Programmer.8 1124,3626 1200,3626 1230,3656 1230,3693 1250.03,3713.03 1409.97,3713.03 2003,3120 2391,3120 2431,3080 2431,2915 v1(2558,2788)
TDO_SWO: MSP432.93 Programmer.6 | length 2430.3
  Top Layer w9: v1(2544,2857) 2519.5,2832.5 2519.5,2769.51 2540,2749.01 2585.93,2749.01 2623.49,2786.57 MSP432.93
  Bottom Layer w9: Programmer.6 924,3714 1218.97,3714 1236,3731.03 1563.97,3731.03 2080,3215 2379,3215 2544,3050 v1(2544,2857)
TMS_SWDIO: MSP432.94 Programmer.2 | length 3053.5
  Top Layer w9: MSP432.94 2723.89,2766.89 v1(2728,2771)
  Bottom Layer w9: Programmer.2 559.03,3749.03 2264.97,3749.03 2414,3600 2414,3380 2728,3066 v1(2728,2771)
VCORE: C8.1 C10.1 MSP432.12 | length 992
  Top Layer w9: C8.1 2920,1991.57 2920,2387.71 2940.31,2408.03 MSP432.12
  Bottom Layer w9: C8.1 C10.1
VSW: MSP432.14
WIFI_A0: WifiBreakoutHeader1.1 WifiHeader1.1 | length 170
  Top Layer w9: WifiBreakoutHeader1.1 WifiHeader1.1
WIFI_CLK: WifiBreakoutHeader1.9 WifiHeader1.9 | length 170
  Top Layer w9: WifiBreakoutHeader1.9 WifiHeader1.9
WIFI_CMD: WifiBreakoutHeader1.7 WifiHeader1.7 | length 170
  Top Layer w9: WifiBreakoutHeader1.7 WifiHeader1.7
WIFI_D0: WifiBreakoutHeader2.15 WifiHeader2.15 | length 165
  Top Layer w9: WifiBreakoutHeader2.15 WifiHeader2.15
WIFI_D1: WifiBreakoutHeader2.14 WifiHeader2.14 | length 165
  Top Layer w9: WifiBreakoutHeader2.14 WifiHeader2.14
WIFI_D2: WifiBreakoutHeader2.13 WifiHeader2.13 | length 165
  Top Layer w9: WifiBreakoutHeader2.13 WifiHeader2.13
WIFI_D3: WifiBreakoutHeader2.12 WifiHeader2.12 | length 165
  Top Layer w9: WifiBreakoutHeader2.12 WifiHeader2.12
WIFI_D4: WifiBreakoutHeader2.11 WifiHeader2.11 | length 165
  Top Layer w9: WifiBreakoutHeader2.11 WifiHeader2.11
WIFI_D5: WifiBreakoutHeader2.8 WifiHeader2.8 | length 165
  Top Layer w9: WifiBreakoutHeader2.8 WifiHeader2.8
WIFI_D6: WifiBreakoutHeader2.7 WifiHeader2.7 | length 165
  Top Layer w9: WifiBreakoutHeader2.7 WifiHeader2.7
WIFI_D7: WifiBreakoutHeader2.6 WifiHeader2.6 | length 165
  Top Layer w9: WifiBreakoutHeader2.6 WifiHeader2.6
WIFI_D8: WifiBreakoutHeader2.5 WifiHeader2.5 | length 165
  Top Layer w9: WifiBreakoutHeader2.5 WifiHeader2.5
WIFI_EN: WifiBreakoutHeader1.12 WifiHeader1.12 | length 170
  Top Layer w9: WifiBreakoutHeader1.12 WifiHeader1.12
WIFI_RST: WifiBreakoutHeader1.13 WifiHeader1.13 | length 170
  Top Layer w9: WifiBreakoutHeader1.13 WifiHeader1.13
WIFI_RSV1: WifiBreakoutHeader1.2 WifiHeader1.2 | length 170
  Top Layer w9: WifiBreakoutHeader1.2 WifiHeader1.2
WIFI_RSV2: WifiBreakoutHeader1.3 WifiHeader1.3 | length 170
  Top Layer w9: WifiBreakoutHeader1.3 WifiHeader1.3
WIFI_SD0: WifiBreakoutHeader1.8 WifiHeader1.8 | length 170
  Top Layer w9: WifiBreakoutHeader1.8 WifiHeader1.8
WIFI_SD1: WifiBreakoutHeader1.6 WifiHeader1.6 | length 170
  Top Layer w9: WifiBreakoutHeader1.6 WifiHeader1.6
WIFI_SD2: WifiBreakoutHeader1.5 WifiHeader1.5 | length 170
  Top Layer w9: WifiBreakoutHeader1.5 WifiHeader1.5
WIFI_SD3: WifiBreakoutHeader1.4 WifiHeader1.4 | length 170
  Top Layer w9: WifiBreakoutHeader1.4 WifiHeader1.4
WIFI_VIN: WifiBreakoutHeader1.15 WifiHeader1.15 | length 170
  Top Layer w9: WifiBreakoutHeader1.15 WifiHeader1.15
pads on no net: MSP432.41 MSP432.42 MSP432.85 MSP432.86 R8.2 R8.3 R8.4 R8.13 R8.14 R8.15 Reset.3 Reset.4 S1.3 S1.4 S2.3 S2.4 S3.3 S3.4 S4.3 S4.4

## Polygon pours and split planes (outlines as drawn)
GND on Top Layer "Bottom Layer-No Net" (solid, pour order 2): 0,790 0,4000 6000,4000 6000,800 5215,15 5215,0 820,0 15,805 0,805
GND on Bottom Layer "Bottom Layer-No Net" (solid, pour order 0): 795,0 790,0 0,790 0,4000 6000,4000 6000,785 5215,0 795,0

## Keep-outs
Keep-Out Layer:
  lines w10: 0,790 0,4000 6000,4000 6000,785 5215,0 795,0 2.5,792.5

## Silkscreen, mask and mechanical layers (free items; w line width, h text height)
Top Overlay:
  text "James Bocinsky  / Mason Rawson" at 4100,85 h80
  text "Glorious Freedom" at 830,70 h130

## Text inside footprints (layer, text, board x,y; h text height)
Breakout1: Top Overlay "2" at 2355,2440 h50; Top Overlay "1" at 2365,2145 h50; Top Overlay "25" at 3530,2145 h50; Top Overlay "26" at 3515,2435 h50
Breakout2: Top Overlay "27" at 3755,2245 h50; Top Overlay "28" at 3640,2245 h50; Top Overlay "49" at 3750,3545 h50; Top Overlay "50" at 3635,3540 h50
Breakout3: Top Overlay "52" at 3520,3340 h50; Top Overlay "51" at 3540,3645 h50; Top Overlay "75" at 2330,3650 h50; Top Overlay "76" at 2340,3340 h50
Breakout4: Top Overlay "77" at 2100,3540 h50; Top Overlay "78" at 2220,3540 h50; Top Overlay "99" at 2060,2245 h50; Top Overlay "100" at 2180,2245 h50